# Allegro board PROIECT1_OPREACOSMIN_N18.brd
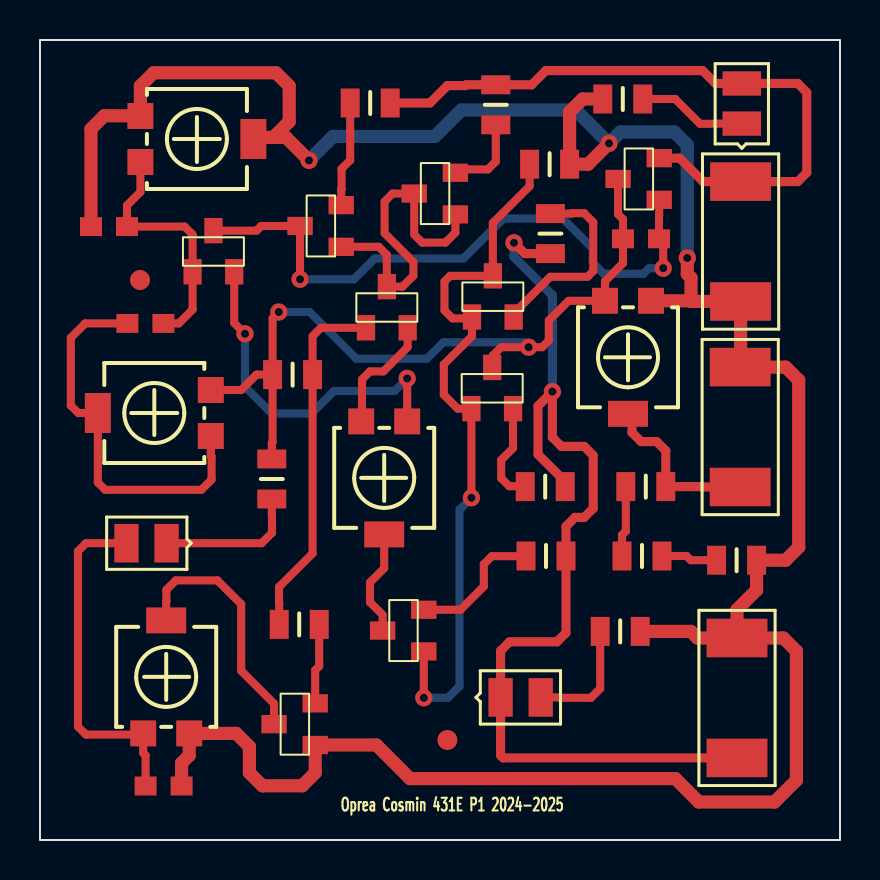
[diagram p0: board, top side]
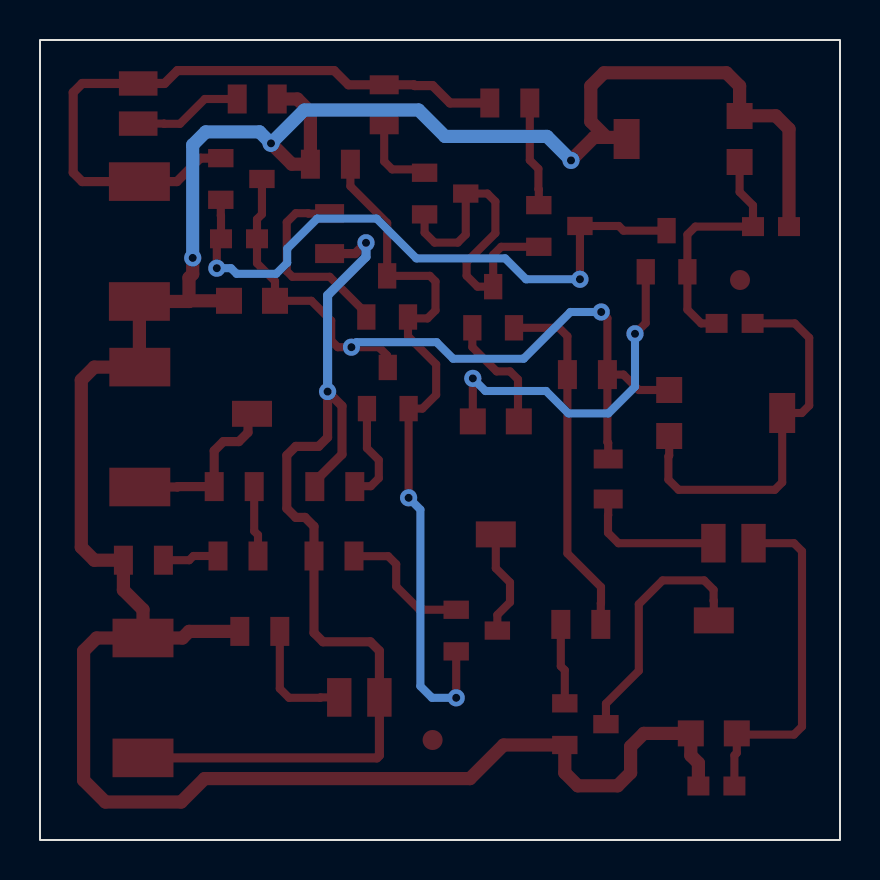
[diagram p1: board, bottom side, seen from below]

Outline 40 x 40 mm; copper layers: TOP, BOTTOM. Coordinates in mm from the lower left corner of the outline.
Outline path: rectangle 0,0 40,40

## Design rules (mm)
nets with their own width: min track width 0.406; nets IN+ N188663 N188669 N188797 N188819 N189005 N189027 N189127 N189199 N189245 N189351 N189387 N189515 N189567 N189671 N189675 N189825 N211822 N212519 N1892590 N1896251 N2182811 N2410220
nets with their own width: min track width 0.457; nets OUT VIN+ VIN-
nets with their own width: min track width 0.66; nets GND

## Placement (name value [footprint] x y rotation side)
C2  2.2n  [CAPC2008X126N_0805]  3.45 30.67 0 top
C4  470n  [CAPC2008X126N_0805]  6.18 2.7 180 top
C5  2.2n  [CAPC2008X126N_0805]  5.27 25.83 180 top
C6  470p  [CAPC2008X126N_0805]  30.05 30.06 180 top
D3  1N4148  [SMD0805]  6.33 14.84 180 top
D6  5V,LED,LED  [SMD080512]  35.09 35.82 90 top
D7  5V,LED,LED  [SMD080512]  23.03 7.13 0 top
J1  CON2  [SMR2512]  35.03 32.92 270 top
J2  CON2  [SMR2512]  34.85 10.1 270 top
J3  CON2  [SMR2512]  35.01 17.65 90 top
NOREF  -  [unnamed]  5 28 0 top
NOREF#2  -  [unnamed]  20.37 5 0 top
P1  500k  [TS53YL]  7.46 5.33 270 top
P2  10k  [TS53YL]  5.02 33.9 180 top
P3  10k  [TS53YL]  8.54 22.5 0 top
P4  100  [TS53YL]  16.06 20.93 90 top
P5  10k  [TS53YL]  28.25 26.96 90 top
Q1  QBC846B  [TO236AA]  21.6 26.15 270 top
Q2  QBC846B  [TO236AA]  19.19 9.43 0 top
Q3  QBC817-25  [TO236AA]  16.3 25.61 270 top
Q4  QBC817-25  [TO236AA]  7.63 28.41 270 top
Q5  QBC856B  [TO236AA]  20.77 31.28 0 top
Q6  QBC856B  [TO236AA]  15.06 29.66 0 top
Q7  QBC856B  [TO236AA]  30.96 32.01 0 top
Q8  QBC846B  [TO236AA]  21.57 21.57 270 top
R1  68  [RES2012X50N_0805]  25.52 30.32 90 top
R2  51  [RES2012X50N_0805]  25.3 14.2 180 top
R3  22  [RES2012X50N_0805]  25.26 17.67 180 top
R4  10k  [RES2012X50N_0805]  12.96 10.78 0 top
R5  22k  [RES2012X50N_0805]  12.63 23.27 0 top
R6  10  [RES2012X50N_0805]  22.79 36.76 90 top
R7  10  [RES2012X50N_0805]  16.51 36.85 0 top
R8  4.7k  [RES2012X50N_0805]  11.59 18.05 270 top
RD6  100  [RES2012X50N_0805]  29.14 37.05 0 top
RD7  100  [RES2012X50N_0805]  29.01 10.43 0 top
RF  1k  [RES2012X50N_0805]  25.48 33.79 0 top
RL1  15k  [RES2012X50N_0805]  30.29 17.67 180 top
RL2  2k  [RES2012X50N_0805]  30.1 14.2 180 top
RL3  1k  [RES2012X50N_0805]  34.83 13.99 180 top
T1  JMMBFJ309LT1  [TO236AA]  13.76 4.75 0 top

## Library data of the parts
C2 C4-C6 = C
D3 = 1N4148_10
D6 = LED_8
D7 = LED_9
J1-J3 = CON2
P1-P4 = POT
P5 = POT_0
Q1 = QBC846B_1
Q2 = QBC846B_2
Q3 = QBC817-25_0
Q4 = QBC817-25_1
Q5 = QBC856B_0
Q6 = QBC856B_1
Q7 = QBC856B_3
Q8 = QBC846B_3
R1-R8 RD6 RD7 RF RL1-RL3 = R
T1 = JMMBFJ309LT1_2

## Footprints (pads in the part's own frame, mm; a bottom-side part is the same pattern mirrored in y, then rotated)
CAPC2008X126N_0805
  rect 1.1x0.95 smd: 1(-0.9,0) 2(0.9,0)
RES2012X50N_0805
  rect 0.95x1.45 smd: 1(-1,0) 2(1,0)
SMD0805
  rect 1.219x1.93 smd: A(2.007,0) C(0,0)
SMD080512
  rect 1.219x1.93 smd: 1(0,0) 2(2.007,0)
SMR2512
  rect 1.93x3.048 smd: 1(0,0) 2(5.994,0)
TO236AA
  rect 1.27x0.914 smd: 1(0,0) 2(0,2.083) 3(-2.057,1.041)
TS53YL
  rect 1.3x1.3 smd: 1(0,0) 3(0,-2.3)
  rect 1.3x2 smd: 2(-5.65,-1.15)
unnamed
  round 1 smd: (0,0)

## Nets
GND: C2.1 C4.1 J1.2 J2.1 J3.2 P1.1 P2.2(T) P2.3 P5.3 RD6.1 RD7.2 RF.2 RL3.1 T1.1
VIN+: D6.2 J1.1 Q7.2(E) R6.2 R7.2
VIN-: D7.1(C) J2.2 R1.1 R2.1 R3.1
IN+: C2.2 C5.1 P2.1 Q4.1
OUT: J3.1 P5.2(T) RL1.1
N188663: Q5.2(E) R6.1
N188669: Q6.2(E) R7.1
N188797: Q3.3 Q5.1 Q5.3 Q6.1
N188819: C6.1 Q4.3 Q6.3 Q7.1
N189005: C5.2 P3.2(T) P3.3
N189027: C6.2 P3.1 P5.1 Q7.3 Q8.3 R5.1 R8.1
N189127: Q3.1 R4.1 R5.2
N189199: P4.1 Q3.2(E)
N189245: P4.3 Q4.2(E)
N189351: P4.2(T) Q2.3
N189387: D3.C R8.2
N189515: R4.2 T1.2(S)
N189567: Q1.1 Q1.3 Q2.1 Q8.1 RF.1
N189671: C4.2 D3.A P1.3
N189675: Q1.2(E) R1.2
N189825: P1.2(T) T1.3
N211822: D6.1(C) RD6.2
N212519: D7.2 RD7.1
N1892590: RL1.2 RL2.2
N1896251: Q2.2(E) R2.2
N2182811: Q8.2(E) R3.2
N2410220: RL2.1 RL3.2

## Via types
v1: diameter 0.864, hole 0.4, TOP to BOTTOM, 13 vias

## Routing (per net, layer and track width the routed paths; a pad name or vN(x,y) marks a point on that pad's centre or on a via; arc(x,y) is an arc through that point)
GND: length 138.3
  TOP w0.66: RD6.1 27.13,37.05 26.48,36.4 RF.2 27.41,33.79 v1(28.45,34.83) ; J2.1 32.87,10.1 32.54,10.43 RD7.2 ; J2.1 34.85,11.52 35.83,12.5 RL3.1 37.29,13.99 37.94,14.64 37.94,22.99 37.29,23.64 J3.2 35.03,23.66 J1.2 32.55,26.93 32.53,26.95 ; J2.1 37.17,10.1 37.82,9.45 37.82,2.99 36.73,1.9 32.94,1.9 31.77,3.07 18.5,3.07 16.82,4.75 T1.1 13.76,3.36 13.11,2.71 11.12,2.71 10.47,3.36 10.47,4.67 9.81,5.33 P1.1 7.46,4.23 7.08,3.85 C4.1 ; 11.67,35.13 10.75,35.13 P2.2 ; 11.67,35.13 12.46,35.92 12.46,37.7 11.8,38.36 5.68,38.36 5.02,37.7 P2.3 5.01,36.21 3.21,36.21 2.55,35.55 C2.1 ; 11.67,35.13 12.3,35.13 v1(13.45,33.98) ; 32.53,26.95 32.55,26.98 32.55,28.11 32.37,28.3 v1(32.37,29.11) ; 32.53,26.95 32.52,26.96 P5.3
  BOTTOM w0.66: v1(13.45,33.98) 14.65,35.18 19.75,35.18 21.07,36.5 26.78,36.5 v1(28.45,34.83) 29.02,35.4 31.71,35.4 32.37,34.75 v1(32.37,29.11)
VIN+: length 34
  TOP w0.457: R7.2 19.5,36.85 20.37,37.72 21.26,37.72 21.3,37.76 R6.2 24.58,37.76 25.29,38.47 33.13,38.47 33.77,37.83 D6.2 37.89,37.83 38.34,37.38 38.34,33.37 37.89,32.92 J1.1 33.15,32.92 31.98,34.09 Q7.2
VIN-: length 51
  TOP w0.457: R3.1 26.26,17.92 24.9,19.28 24.9,21.7 v1(25.62,22.42) 25.62,20.13 26.07,19.68 27.21,19.68 27.66,19.23 27.66,16.58 27.21,16.13 26.75,16.13 26.3,15.68 R2.1 26.3,10.36 25.85,9.91 23.48,9.91 23.03,9.46 D7.1 23.03,4.23 23.16,4.11 J2.2 ; R1.1 24.24,29.32 v1(23.7,29.86)
  BOTTOM w0.457: v1(23.7,29.86) 23.7,29.15 25.62,27.23 v1(25.62,22.42)
IN+: length 12.4
  TOP w0.406: C5.1 6.94,25.83 7.63,26.52 Q4.1 7.63,30.27 7.23,30.67 C2.2 4.35,31.73 5.02,32.4 P2.1
OUT: length 8.6
  TOP w0.457: P5.2 29.6,21.11 29.6,20.38 30.06,19.92 30.83,19.92 31.29,19.46 RL1.1 33.11,17.67 33.13,17.65 J3.1
N188663: length 4.1
  TOP w0.406: Q5.2 20.94,33.53 22.39,33.53 22.79,33.93 R6.1
N188669: length 5.3
  TOP w0.406: Q6.2 15.06,32.53 15.08,32.55 15.08,33.56 15.51,33.99 R7.1
N188797: length 16.9
  TOP w0.406: Q5.1 20.77,30.37 20.27,29.87 19.11,29.87 18.71,30.27 Q5.3 17.63,32.32 17.23,31.92 17.23,30.34 18.67,28.9 18.67,28.21 18.13,27.67 Q3.3 17.34,27.67 17.34,29.26 16.94,29.66 Q6.1
N188819: length 31.7
  TOP w0.406: v1(31.16,28.59) 31.16,29.85 C6.1 30.95,31.21 30.96,31.22 Q7.1 ; v1(13,28.04) Q6.3 11.06,30.7 10.83,30.47 Q4.3
  BOTTOM w0.406: v1(31.16,28.59) 30.45,28.59 30.17,28.31 28.19,28.31 27.64,28.86 27.64,29.57 26.14,31.07 23.17,31.07 21.18,29.08 16.74,29.08 15.7,28.04 v1(13,28.04)
N189005: length 19.7
  TOP w0.406: P3.3 8.54,19.22 8.58,19.18 8.58,18.02 8.07,17.51 3.26,17.51 2.89,17.88 P3.2 1.91,21.35 1.54,21.72 1.54,25.11 2.26,25.83 C5.2
N189027: length 39.3
  TOP w0.406: R8.1 11.59,19.85 11.63,19.89 R5.1 ; Q8.3 22.65,23.67 ; 22.65,23.67 22.65,23.67 ; 22.65,23.67 22.65,24.23 23.06,24.64 v1(24.43,24.64) 25.11,24.64 25.44,24.97 25.44,25.97 26.43,26.96 P5.1 28.25,27.94 29.15,28.84 C6.2 29.15,31.04 28.9,31.29 Q7.3 ; R5.1 11.63,26.09 v1(11.94,26.4) ; R5.1 10.83,23.27 10.06,22.5 P3.1
  BOTTOM w0.406: v1(11.94,26.4) 13.48,26.4 15.81,24.07 19.34,24.07 20.17,24.89 24.18,24.89 v1(24.43,24.64)
N189127: length 18
  TOP w0.406: R4.1 11.96,11.83 11.95,11.84 11.95,12.65 13.63,14.33 R5.2 13.63,25.19 14.05,25.61 Q3.1
N189199: length 6
  TOP w0.406: Q3.2 18.38,24.64 17.17,23.43 16.5,23.43 16.1,23.03 16.1,20.97 P4.1
N189245: length 17.5
  TOP w0.406: v1(18.36,23.08) P4.3 ; v1(10.25,25.31) 9.71,25.85 Q4.2
  BOTTOM w0.406: v1(10.25,25.31) 10.25,22.66 11.58,21.33 13.58,21.33 14.7,22.45 17.73,22.45 v1(18.36,23.08)
N189351: length 5.4
  TOP w0.406: Q2.3 17.13,11.26 16.5,11.89 16.5,12.88 17.21,13.59 P4.2
N189387: length 7.2
  TOP w0.406: R8.2 11.59,16.25 11.6,16.24 11.6,15.36 11.08,14.84 D3.C
N189515: length 4
  TOP w0.406: R4.2 13.96,8.69 13.76,8.49 T1.2
N189567: length 36.5
  TOP w0.406: v1(21.57,17.11) Q8.1 20.88,21.57 20.19,22.26 20.19,23.78 21.6,25.19 Q1.1 21.53,26.08 20.62,26.08 20.22,26.48 20.22,27.92 20.51,28.21 Q1.3 22.64,30.85 24.48,32.69 RF.1 ; Q2.1 v1(19.19,7.11)
  BOTTOM w0.406: v1(19.19,7.11) 20.4,7.11 20.98,7.69 20.98,16.52 v1(21.57,17.11)
N189671: length 17.5
  TOP w0.406: D3.A 2.3,14.84 1.9,14.44 1.9,5.67 2.3,5.27 5.1,5.27 P1.3 5.16,4.35 5.28,4.23 C4.2
N189675: length 9.8
  TOP w0.406: R1.2 26.57,31.32 26.59,31.34 27.21,31.34 27.66,30.89 27.66,28.44 27.38,28.16 25.52,28.16 23.68,26.33 Q1.2
N189825: length 12.6
  TOP w0.406: P1.2 6.31,11.96 6.32,11.97 6.32,12.51 6.79,12.98 8.87,12.98 10.06,11.79 10.06,8.46 11.7,6.82 T1.3
N211822: length 5.5
  TOP w0.406: RD6.2 31.76,37.05 33,35.81 33.79,35.81 33.8,35.82 D6.1
N212519: length 6
  TOP w0.406: D7.2 25.97,7.13 25.99,7.11 27.55,7.11 28.01,7.57 RD7.1
N1892590: length 3.5
  TOP w0.406: RL2.2 29.1,15.25 29.29,15.44 RL1.2
N1896251: length 6.9
  TOP w0.406: Q2.2 21.02,11.51 22.19,12.68 22.19,13.79 22.59,14.19 24.29,14.19 R2.2
N2182811: length 5.1
  TOP w0.406: R3.2 24.24,17.69 23.46,17.69 23.06,18.09 23.06,19 23.65,19.59 Q8.2
N2410220: length 2.8
  TOP w0.406: RL2.1 32.33,14.2 32.54,13.99 RL3.2

## Text on the board
Ref Des/Silkscreen Top: Oprea Cosmin 431E P1 2024-2025
XSECTION_CHART: *  SURFACE | L1 TOP CONDUCTOR | *  DIELECTRIC | L2 BOTTOM CONDUCTOR | DESIGN CROSS SECTION CHART | ___________________________ | TOTAL THICKNESS 1.6 MM | 1-2
DISPLAY_TOP: FIGURE | FINISHED_SIZE | 0.4 | DRILL CHART: TOP to BOTTOM | ALL UNITS ARE IN MILLIMETERS | PLATED | QTY | 13
